# Altium PCB Audio ADC.PcbDoc
Units mil, origin at the board's own origin, x right, y up, seen from the top; angles counter-clockwise.
Board outline 2385 x 2675 mil, 2 copper layers (Top Layer, Bottom Layer); 54 components, 44 nets, 197 pads, 10 vias.
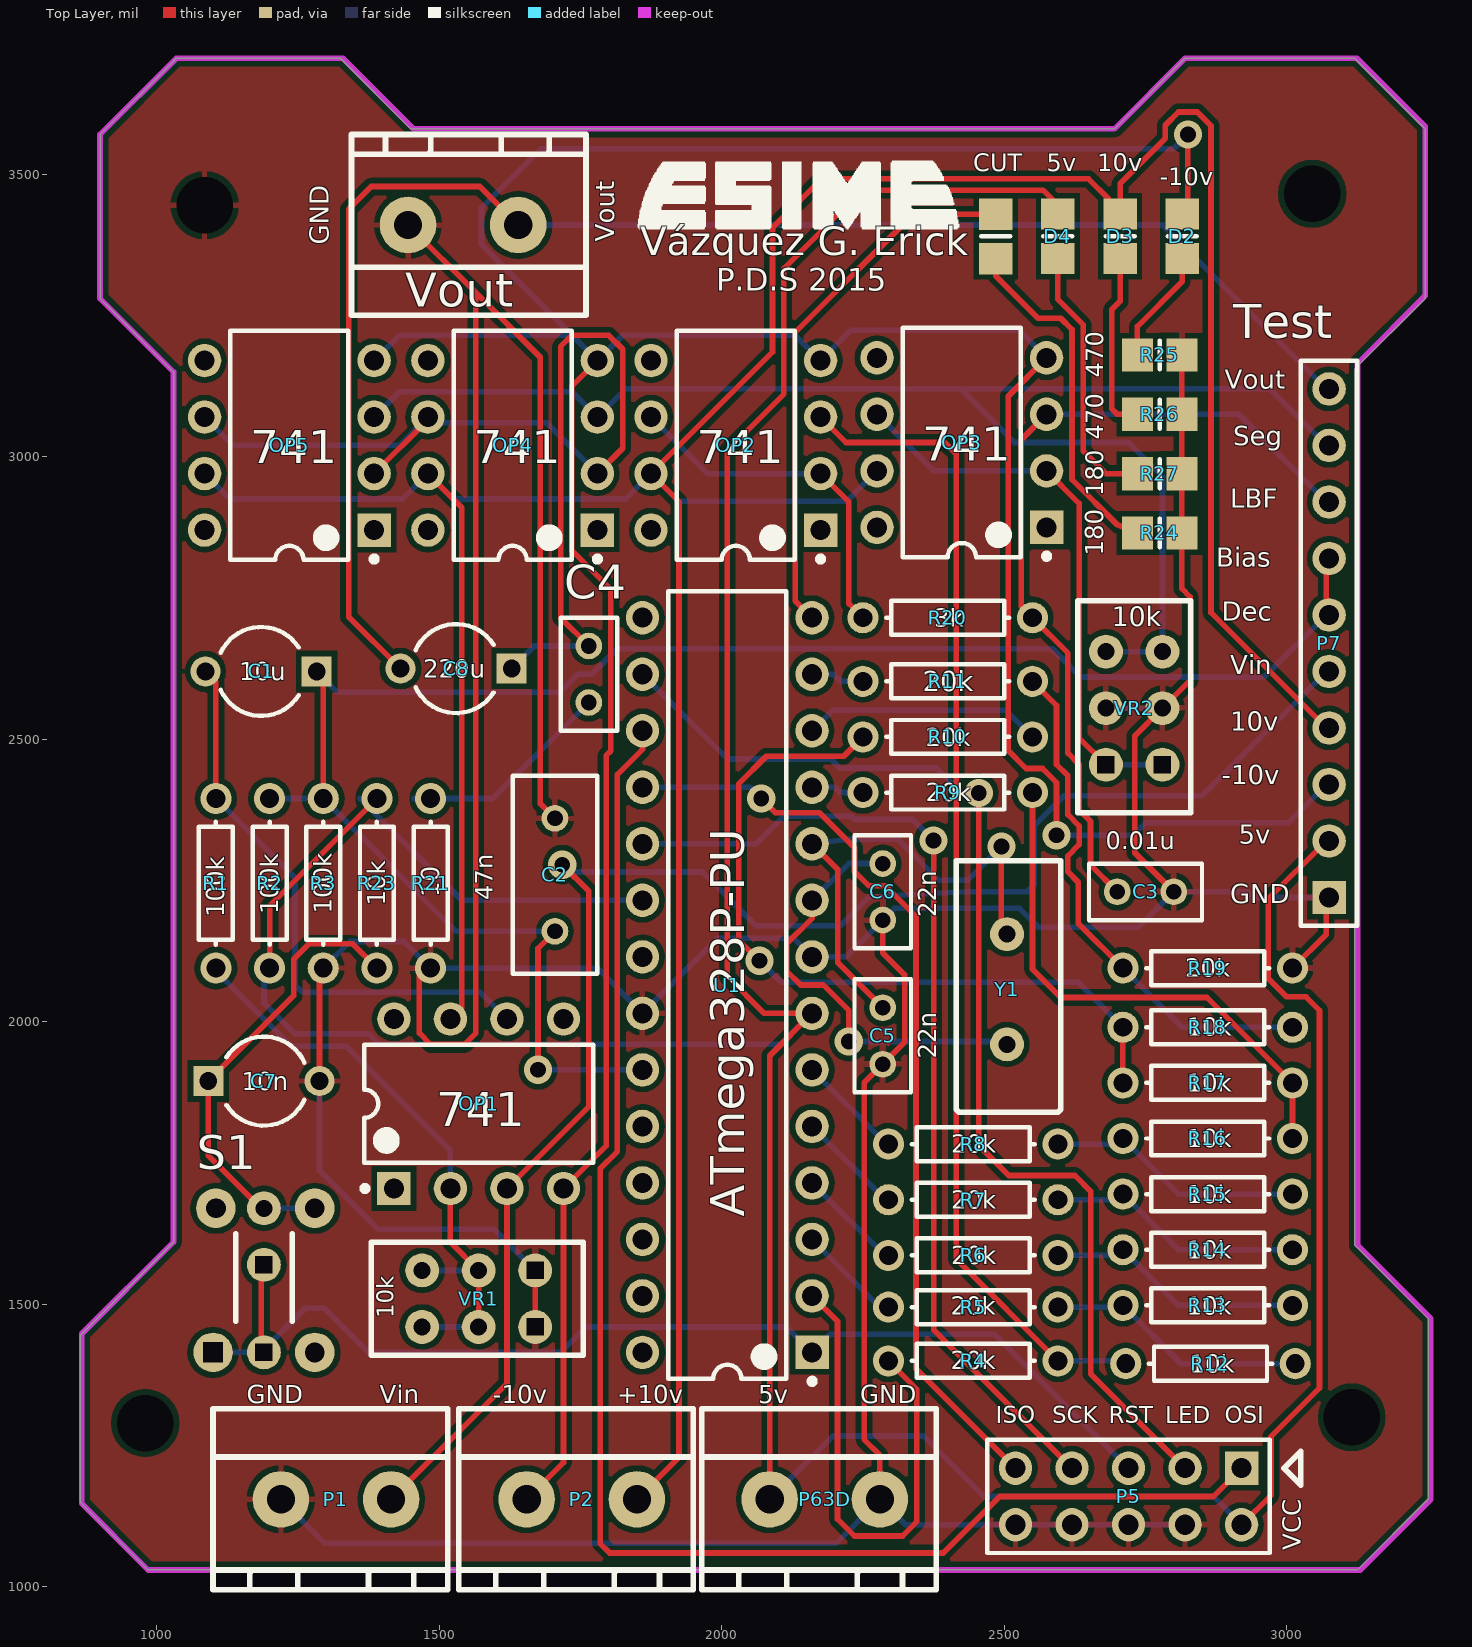
[diagram p0: Top Layer view]
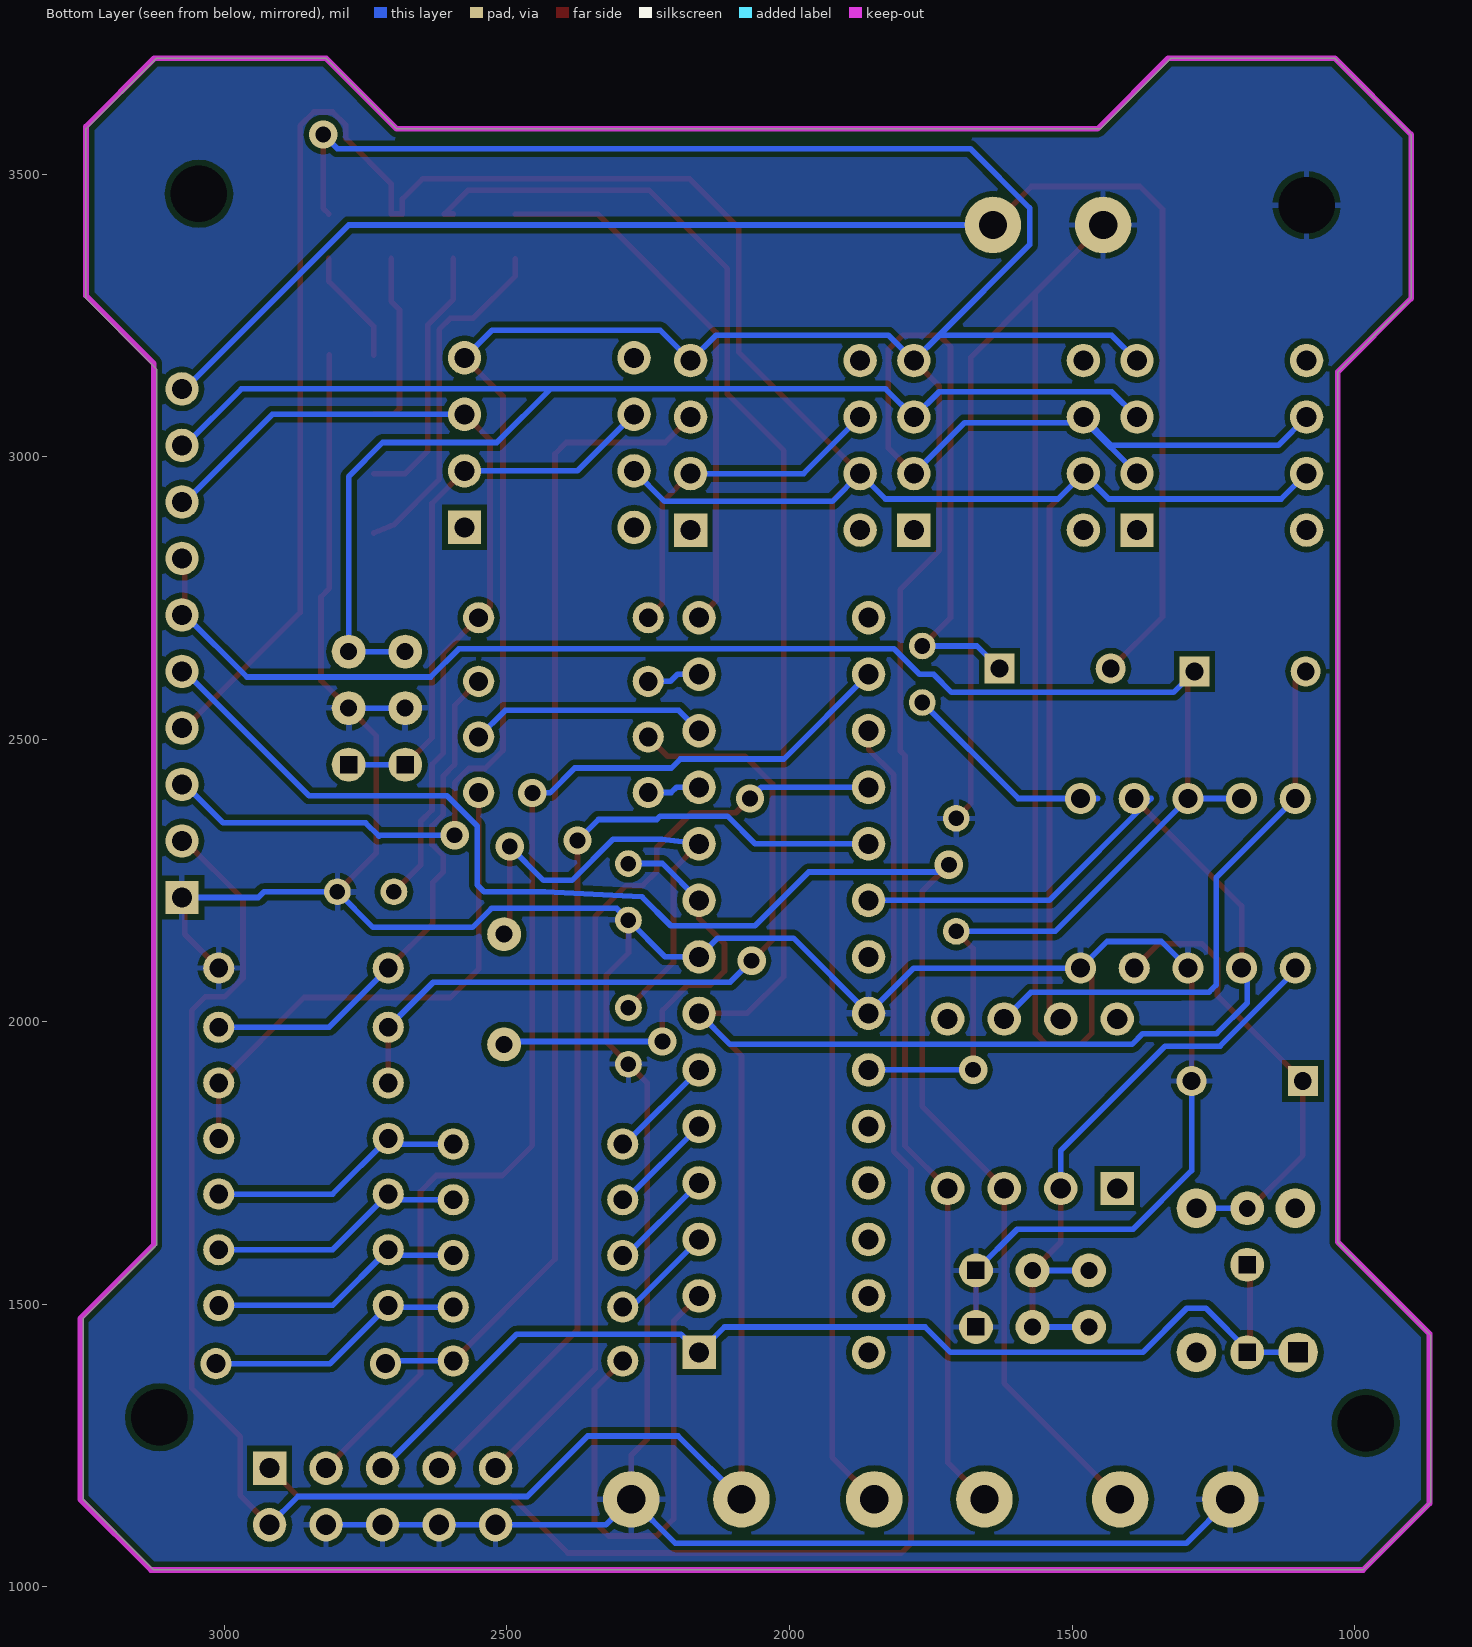
[diagram p1: Bottom Layer view, seen from below]

## Layer stack, top to bottom
Top Solder: solder mask 0.4, Solder Resist, Dk 3.5
Top Layer: signal copper 1.4
Dielectric1: dielectric 12.6, FR-4, Dk 4.8
Bottom Layer: signal copper 1.4
Bottom Solder: solder mask 0.4, Solder Resist, Dk 3.5

## Board outline
3125,1030 3250,1155 3250,1460 3250,1475 3125,1600 3120,1605 3120,3115 3120,3155 3245,3280 3245,3580 3120,3705 2820,3705 2695,3580 1450,3580 1325,3705 1035,3705 1025,3695 900,3570 900,3560 900,3280 920,3260 1030,3150 1030,3135 1030,1610 965,1545 865,1445 865,1150 870,1145 985,1030 1025,1030 1000,1030

## Design rules (kind name [scope] priority, off if disabled: settings)
Clearance [All] p1: gap=10
ComponentClearance [All] p1: gap=5 collisioncheckmode=3 verticalgap=5 showdistances=FALSE
HoleSize [All] p1: absolutevalues=TRUE maxlimit=100 minlimit=13 maxpercent=80.000 minpercent=20.000
PlaneConnect [InNet('GND')] p1: planeconnectstyle=Direct reliefexpansion=20 reliefentries=4 reliefconductorwidth=10 reliefairgap=10
PolygonConnect [All] p1: connectstyle=Relief reliefconductorwidth=10 reliefentries=4 polygonreliefangle="90 Angle" airgapwidth=10
RoomDefinition "Audio ADC" [InComponentClass('Audio ADC')] p1 off: confinementstyle=ConfineIn formatcopy=TRUE lockcomponents=FALSE outline 3295,1090 3640,1090 3640,1460 3295,1460
RoutingVias [All] p1 off: holewidth=28 width=50 viastyle="Through Hole" minholewidth=28 minwidth=50 maxholewidth=28 maxwidth=50
SilkToSilkClearance [All] p1: silktosilkclearance=0
SilkToSolderMaskClearance [All] p1: minsilkscreentomaskgap=1 clearancetoexposedcopper=TRUE
SolderMaskExpansion [All] p1: expansion=4
UnpouredPolygon [All] p1: allowunpoured=FALSE
Width [All] p1: maxlimit=10 minlimit=10 preferedwidth=10
24 further rules are at their usual default settings.

## Components (designator, comment, footprint, x,y, rotation, side; value= is the part's Value field where it differs from the comment)
C1 "10u" CAPR5-4X5 1185,2620 r180 top
C2 "47n" RAD-0.2 1705,2260 r270 top
C3 "0.01u" RAD-0.1 2750,2230 r180 top
C4 "Cap" RAD-0.1 1765,2615 r270 top
C5 "22n" RAD-0.1 2285,1975 r90 top
C6 "22n" RAD-0.1 2285,2230 r90 top
C7 "10n" CAPR5-4X5 1190,1895 r0 top
C8 "220u" CAPR5-4X5 1530,2625 r180 top
CUT "LED1" 6-0805_M 2485,3389.69 r270 top (schematic designator D1)
D2 "-10v" 6-0805_M 2815,3390 r90 top
D3 "10v" 6-0805_M 2705,3390 r270 top
D4 "5v" 6-0805_M 2595,3390 r270 top
OP1 "741" DIP-8 1570,1855 r90 top
OP2 "741" DIP-8 2025,3020 r180 top
OP3 "741" DIP-8 2425,3025 r180 top
OP4 "741" DIP-8 1630,3020 r180 top
OP5 "741" DIP-8 1235,3020 r180 top
P1 "Vin" cONECTOR 1215,1055 r0 top
P2 "+10v" cONECTOR 1650,1055 r0 top
P5 "VCC" HDR2X5 2920,1210 r180 top
P7 "Test" HDR1X10 3075,2220 r90 top
P63D "5v" cONECTOR 2080,1055 r0 top
R1 "100k" AXIAL-0.3 1105,2245 r90 top
R2 "100k" AXIAL-0.3 1200,2245 r270 top
R3 "100k" AXIAL-0.3 1295,2245 r90 top
R4 "20k" AXIAL-0.3 2445,1400 r0 top
R5 "20k" AXIAL-0.3 2445,1495 r0 top
R6 "20k" AXIAL-0.3 2445,1586.65 r0 top
R7 "20k" AXIAL-0.3 2445,1685.08 r0 top
R8 "20k" AXIAL-0.3 2445,1783.5 r0 top
R9 "20k" AXIAL-0.3 2400,2405.63 r0 top
R10 "20k" AXIAL-0.3 2400,2504.06 r180 top
R11 "20k" AXIAL-0.3 2400,2602.48 r0 top
R12 "10k" AXIAL-0.3 2865,1395 r180 top
R13 "10k" AXIAL-0.3 2860,1498.23 r180 top
R14 "10k" AXIAL-0.3 2860,1596.65 r180 top
R15 "10k" AXIAL-0.3 2860,1695.08 r180 top
R16 "10k" AXIAL-0.3 2860,1793.5 r180 top
R17 "10k" AXIAL-0.3 2860,1891.93 r0 top
R18 "10k" AXIAL-0.3 2860,1990.35 r180 top
R19 "20k" AXIAL-0.3 2860,2095 r180 top
R20 "3k" AXIAL-0.3 2400,2715 r180 top
R21 "10" AXIAL-0.3 1485,2245 r90 top
R23 "10k" AXIAL-0.3 1390,2245 r270 top
R24 "180" 6-0805_M 2775,2865 r180 top
R25 "470" 6-0805_M 2775,3180 r180 top
R26 "470" 6-0805_M 2775,3075 r180 top
R27 "180" 6-0805_M 2775,2970 r180 top
S1 "SW-PB" PBUniversal 1190,1540 r90 top
U1 "ATmega328P-PU" 28P3 2010,2065 r180 top
Vout "Speaker" cONECTOR 1645,3510 r180 top
VR1 "10k" TPParado 1570,1460 r180 top
VR2 "10k" TPParado 2680,2555 r90 top
Y1 "16Mhz" Crystal 2505,2065 r90 top

## Footprints (in the part's own frame and the unit in brackets; to place one, negate y for a bottom-side part, rotate by r counter-clockwise, add the part's x,y. Pads: shape width x height; smd on the part's side, far side on the other; paste and mask are expansions set on the pad)
6-0805_M [mm] "Chip Resistor, Body 2.0x1.2mm, IPC Low Density"
  rect 1.4x1.5 smd: 1(-1,0) 2(1,0)
  silkscreen extent 0,-0.65 0,0.65, body extent -1.07,-0.7 1.07,0.7, height 0.7
28P3 [mm] "DIP, 28-Leads, Row Spacing 7.62mm, Pitch 2.54mm, Body 34.67x7.3mm"
  rect 1.5x1.5 hole 0.9: 1(-3.81,16.51)
  round 1.5 hole 0.9: 2(-3.81,13.97) 3(-3.81,11.43) 4(-3.81,8.89) 5(-3.81,6.35) 6(-3.81,3.81) 7(-3.81,1.27) 8(-3.81,-1.27) 9(-3.81,-3.81) 10(-3.81,-6.35) 11(-3.81,-8.89) 12(-3.81,-11.43) 13(-3.81,-13.97) 14(-3.81,-16.51) 15(3.81,-16.51) 16(3.81,-13.97) 17(3.81,-11.43) 18(3.81,-8.89) 19(3.81,-6.35) 20(3.81,-3.81) 21(3.81,-1.27) 22(3.81,1.27) 23(3.81,3.81) 24(3.81,6.35) 25(3.81,8.89) 26(3.81,11.43) 27(3.81,13.97) 28(3.81,16.51)
  silkscreen extent -3.94,-17.7 2.65,17.93, body extent -3.6,-17.65 3.6,17.65, height 4.58
AXIAL-0.3 [mm] "Axial Device, Thru-Hole; 2 Leads; 0.3 in Pin Spacing"
  round 1.4 hole 0.85: 1(-3.81,0) 2(3.81,0)
  silkscreen extent -2.77,-0.76 2.77,0.76
CAPR5-4X5 [mm] "Capacitor; 2 Leads"
  rect 1.35x1.35 hole 0.8: 1(-2.5,0)
  round 1.35 hole 0.8: 2(2.5,0)
  silkscreen extent -1.69,-2 1.82,2
cONECTOR [mil]
  round 100 hole 50: 1(5,100) 2(200,100)
  silkscreen extent -115,-60 300,260, body extent -118,-61 298,260, height 394
Crystal [mil]
  round 60 hole 30: 1(90,0) 2(-105,0)
  silkscreen extent -225,-95 220,90, body extent -228,-97 218,87, height 142
DIP-8 [mm] "DIP; 8 Leads; Row Spacing 7.62 mm; Pitch 2.54 mm"
  rect 1.5x1.5 hole 0.9: 1(-3.81,3.81)
  round 1.5 hole 0.9: 2(-3.81,1.27) 3(-3.81,-1.27) 4(-3.81,-3.81) 5(3.81,-3.81) 6(3.81,-1.27) 7(3.81,1.27) 8(3.81,3.81)
  silkscreen extent -3.93,-5.15 2.65,5.23, body extent -3.6,-5.15 3.6,5.15, height 5.08
HDR1X10 [mm] "Connector; Header; 10 Position"
  rect 1.5x1.5 hole 0.9: 1(0,0)
  round 1.5 hole 0.9: 2(2.54,0) 3(5.08,0) 4(7.62,0) 5(10.16,0) 6(12.7,0) 7(15.24,0) 8(17.78,0) 9(20.32,0) 10(22.86,0)
  silkscreen extent -1.27,-1.27 24.13,1.27
HDR2X5 [mm] "Connector; Header; 5x2 Position"
  rect 1.5x1.5 hole 0.9: 1(0,0)
  round 1.5 hole 0.9: 2(0,2.54) 3(2.54,0) 4(2.54,2.54) 5(5.08,0) 6(5.08,2.54) 7(7.62,0) 8(7.62,2.54) 9(10.16,0) 10(10.16,2.54)
  silkscreen extent -1.27,-1.27 11.43,3.81, body extent -1.37,-1.37 11.53,3.91
PBUniversal [mil]
  round 60 hole 30 square: 1(-125,0) 1(30,0)
  round 70 hole 35 square: 1(-125,90)
  round 70 hole 35: 2(130,-90) NC(-125,-90) NC(130,85)
  round 60 hole 30: 2(130,0)
  silkscreen extent -70,-50 85,50, body extent -152,-119 152,119, height 198
RAD-0.1 [mm] "Radial Cap, Thru-Hole; 2 Leads; 0.1 in Pin Spacing"
  round 1.2 hole 0.7: 1(-1.27,0) 2(1.27,0)
  silkscreen extent -2.54,-1.27 2.54,1.27
RAD-0.2 [mm] "Radial Cap, Thru-Hole; 2 Leads; 0.2 in Pin Spacing"
  round 1.2 hole 0.7: 1(-2.54,0) 2(2.54,0)
  silkscreen extent -4.44,-1.91 4.44,1.91
TPParado [mil]
  round 60 hole 30 square: 1(-100,0) 1(-100,-100)
  round 60 hole 30: 2(0,0) 2(0,-100) 3(100,0) 3(100,-100)
  silkscreen extent -185,-150 190,50, body extent -188,-145 188,45, height 458

## Part data
C1 C7 C8: library part Cap2, "Capacitor"
C2 C3 C5 C6: library part Cap, "Capacitor"
C4: "Capacitor"
CUT: "Typical RED GaAs LED"
D2 D3 D4: library part LED1, "Typical RED GaAs LED"
OP1 OP2 OP3 OP4 OP5: library part "Op Amp", "FET Operational Amplifier"
P1 P2 P63D: library part MHDR1X2, "Header, 2-Pin"
P5: library part "Header 5X2", "Header, 5-Pin, Dual row"
P7: library part "Header 10", "Header, 10-Pin"
R1 R2 R3 R4 R5 R6 R7 R8 R9 R10 R11 R12 R13 R14 R15 R16 R17 R18 R19 R20 R21 R23 R24 R25 R26 R27: library part Res1, "Resistor"
S1: "Switch"
U1: "8-bit AVR Microcontroller, 32KB Flash, 1KB EEPROM, 2KB SRAM, 28-pin PDIP, Industrial Grade (-40°C to 85°C)"
Vout: "Loudspeaker"
VR1 VR2: library part RPot, "Potentiometer"
Y1: library part XTAL, "Crystal Oscillator"

## Free pads (board coordinates)
  round 40 hole 100: 0(980,1290) 0(1085,3445) 0(3045,3465) 0(3115,1300)

## Via types
v1: diameter 50, hole 28, Top Layer to Bottom Layer, 10 vias

## Nets (pads, with @x,y where several pads share a name; then routed paths per layer and width w, separated by ;. In a path a pad name is that pad's centre, name@x,y a point inside that pad or via, vN(x,y) a via of type N, cw(c..) or ccw(c..) an arc to the next point about the centre after c; other vN are vias at no path point)
5V: D4.1 P5.2 P7.2 P63D.1 R2.2 R23.1 U1.7 U1.20 | length 7305.6
  Top Layer w10: R2.2 1200,2205 R23.1 ; P63D.1 2085,1940 U1.7 2075,2015 2010,2080 2010,3011 2110,3111 2110,3333 2248.62,3471.62 2568.38,3471.62 2610.63,3429.37 D4.1 ; P5.2 2972,1162 2972,1266 3058,1352 3058,2020 3034,2044 3000,2044 2967,2077 2967,2217 P7.2@3070,2320
  Bottom Layer w10: R2.2@1190,2095 1190,2033.28 1244.28,1979 1375,1979 1394,1960 2105,1960 U1.7 ; 1360,2395 1540,2215 U1.20 ; P63D.1 2197,1267 2357,1267 2464,1160 2870,1160 P5.2
10V: D3.1 OP1.7 OP2.7 OP3.7 OP4.7 OP5.7 P2.2 P7.4 | length 6829.3
  Top Layer w10: OP4.7 1540,2910 1540,2025 OP1.7 ; P2.2 1924.53,1229.53 1924.53,2920.47 OP2.7 2090,3185 2090,3405 2176.62,3491.62 2649.38,3491.62 2685,3456 2685,3429.37 D3.1 2705,3483 2785,3563 2785,3586.57 2808.43,3610 2841.57,3610 2866,3585.57 2866,2724 P7.4@3070,2520
  Bottom Layer w10: OP5.7 1130,2925 1435,2925 OP4.7 1525,2925 1830,2925 OP2.7 1924,2921 2221,2921 OP3.7
-10V: D2.2 OP1.4 OP2.4 OP3.4 OP4.4 OP5.4 P2.1 P7.3 | length 6612.5
  Top Layer w10: P2.1 1720,1220 OP1.4 1795.47,1780.47 1795.47,2471 1804,2479.53 1804,2765 1735,2834 1735,3125 OP4.4 ; OP3.4 2507,3107 2507,2480 2538.81,2448.19 2567.63,2448.19 2592.56,2423.26 v1(2592.56,2330) ; D2.2 2825,3439.37 v1(2825,3570)
  Bottom Layer w10: OP5.4 1430,3215 1735,3215 ; OP3.4 2526,3224 2229,3224 OP2.4 2130,3215 1825,3215 OP4.4 1735,3215 ; v1(2592.56,2330) 2725,2330 2726.5,2328.5 2750,2352 3002,2352 P7.3@3070,2420 ; v1(2825,3570) 2800,3545 1680,3545 1575,3440 1575,3375 1735,3215
CORTE: CUT.1 U1.14 | length 959
  Top Layer w10: U1.14 2130,2745 2130,3220 2339.06,3429.06 CUT.1
"DC BIAS": C1.1 C2.2 P7.6 P7.7 R2.1 R3.2 U1.23 | length 3274.6
  Top Layer w10: C1.1 1295,2608.43 R3.2 ; v1(1675,1915) 1675,2130 C2.2 ; P7.6@3070,2720 P7.7@3070,2820
  Bottom Layer w10: R2.1 R3.2 1530,2160 C2.2 ; C1.1 1320.43,2583 1713,2583 1745,2615 1770,2615 1815,2660 2585,2660 2635,2610 2960,2610 P7.6@3070,2720 ; v1(1675,1915) U1.23
DIGITAL: OP2.3 R4.2 R12.2 | length 2068.6
  Top Layer w10: OP2.3 2220,3025 2395,3025 2415,3005 2415,1580 R4.2
  Bottom Layer w10: R4.2 2710,1400 R12.2
FILTRO: C3.2 OP3.3 P7.8 R20.1 | length 1493.3
  Top Layer w10: OP3.3 2530,3030 2530,2735 R20.1 2612.56,2652.44 2612.56,2475.36 2632.56,2455.36 2632.56,2374.85 2652.56,2354.85 2652.56,2277.44 C3.2
  Bottom Layer w10: OP3.3 2915,3075 P7.8@3070,2920
GND: C2.1 C3.1 C5.1 C6.1 C7.2 P1.1 P5.4 P5.6 P5.8 P5.10 P7.1 P63D.2 pad.0@1085,3445 R3.1 R19.1 R21.1 R24.1 R25.1 R26.1 R27.1 U1.8 U1.22 Vout.2 VR1.1 VR2.2 | length 9658.9
  Top Layer w10: C7.2 R3.1@1288.43,2095 ; Vout.2 1565,3290 ; R21.1@1465,2095 1465,1980 1485,1960 1545,1960 1565,1980 1565,3290 ; R21.1 R21.1@1495,2095 ; VR1.1@1670,1460 VR1.1@1670,1560 ; C2.1 1679,2386 1679,3176 1565,3290 ; P63D.2 2280,1233 2252,1261 2252,1892 C5.1 2324,1964 2324,2083 2285,2122 C6.1 ; C3.1 2731,2299 2731,2506 2780,2555 2829,2604 2829,2752 2814.37,2766.63 R24.1 R27.1 R26.1 R25.1 ; R19.1 3070,2155 P7.1@3070,2220
  Bottom Layer w10: P1.1 1298,1077 2202,1077 P63D.2 2325,1110 P5.10 P5.8 P5.6 P5.4 ; C7.2 1288.43,1736.57 1392,1633 1597,1633 VR1.1@1670,1560 ; R3.1 1342,2142 1438,2142 R21.1 1780,2095 U1.22 1993.03,2148.03 2126.97,2148.03 U1.8 2220,2115 C6.1 2305.75,2200.75 2527.25,2200.75 2561,2167 2737,2167 C3.1 2930,2230 2940,2220 P7.1@3070,2220 ; VR2.2@2680,2555 VR2.2@2780,2555
MISO: P5.9 U1.18 | length 1652.4
  Top Layer w10: v1(2070,2395) 2095,2370 2173,2370 2235,2308 2235,2266 2260,2241 2289,2241 2344,2186 2344,1386 P5.9
  Bottom Layer w10: U1.18 2050,2415 v1(2070,2395)
MOSI: P5.1 U1.17 | length 2673.2
  Top Layer w10: U1.17 1860,2482 1815.47,2437.47 1815.47,1770.47 1785,1740 1785,1077 1802,1060 2392,1060 2492,1160 2870,1160 P5.1
NC: P5.3 U1.16 | length 2096.7
  Top Layer w10: v1(2455,2405) 2455,1781 2508,1728 2625,1728 2653,1700 2653,1377 P5.3
  Bottom Layer w10: U1.16 2010,2465 2193,2465 2209,2449 2380,2449 2424,2405 v1(2455,2405)
NetC1_2: C1.2 OP1.6 R1.2 | length 1028.3
  Top Layer w10: C1.2 1105,2601.57 R1.2
  Bottom Layer w10: R1.2 1245,2255 1245,2065 1257.56,2052.44 ; 1252,2058 1257.56,2052.44 ; OP1.6 1573,2052 1308,2052 1307.56,2052.44 1257.56,2052.44
NetC4_1: C4.1 C8.1 OP4.2 OP4.6 OP5.2 OP5.6 | length 2116.5
  Top Layer w10: OP5.2 1480,3065 OP4.6 ; C4.1 1715,2715 1715,3195 1735,3215 1800,3215 1825,3190 1825,3015 OP4.2
  Bottom Layer w10: OP5.6 1135,3020 1430,3020 OP4.6 ; OP5.2 1475,3060 1690,3060 OP4.2 ; C8.1 1668.43,2665 C4.1
NetC4_2: C4.2 R21.2 | length 380.4
  Bottom Layer w10: 1455,2395 1595,2395 C4.2
NetC7_1: C7.1 R23.2 S1.2 | length 808.4
  Top Layer w10: S1.2@1185,1670 1091.57,1763.43 C7.1 1242.56,2045.99 1242.56,2110.56 1270,2138 1347,2138 R23.2
  Bottom Layer w10: S1.2@1185,1670 S1.2@1275,1670
NetCUT_2: CUT.2 R24.2 | length 621.8
  Top Layer w10: CUT.2 2485,3320 2560,3245 2600,3245 2620,3225 2620,2959.53 2700,2879.53 R24.2
NetD2_1: D2.1 R25.2 | length 203.5
  Top Layer w10: R25.2 2735.63,3230.63 2815,3310 D2.1
NetD3_2: D3.2 R26.2 | length 321.6
  Top Layer w10: D3.2 2705,3275 2690,3260 2690,3085 2700,3075 R26.2
NetD4_2: D4.2 R27.2 | length 471.5
  Top Layer w10: D4.2 2595,3278.28 2640,3233.28 2640,3010 2680,2970 R27.2
NetOP1_2: OP1.2 R1.1 VR1.2 VR1.3 | length 1104.2
  Top Layer w10: OP1.2 1520,1610 1570,1560 VR1.2@1570,1460
  Bottom Layer w10: R1.1@1087.5,2107.5 1238,1957 1335,1957 1520,1772 OP1.2 ; VR1.3@1470,1460 VR1.2@1570,1460 ; VR1.3@1470,1560 VR1.2@1570,1560
NetOP2_2: OP2.2 OP2.6 R20.2 | length 627.5
  Top Layer w10: OP2.2 2225,2920 2225,2740 R20.2
  Bottom Layer w10: OP2.6 1975,2970 OP2.2
NetOP3_2: OP3.2 OP3.6 VR2.1 | length 1004.9
  Top Layer w10: OP3.2 2632.56,2917.44 2632.56,2502.44 VR2.1@2680,2455
  Bottom Layer w10: OP3.6 2375,2975 OP3.2 ; VR2.1@2680,2455 VR2.1@2780,2455
NetR4_1: R4.1 U1.2 | length 882.1
  Top Layer w10: U1.2 2205,1470 2205,1120 2235,1090 2320,1090 2345,1115 2345,1350 R4.1
NetR5_1: R5.1 U1.3 | length 185
  Bottom Layer w10: U1.3 2279.57,1495.43 2279.57,1495 R5.1
NetR5_2: R5.2 R12.1 R13.2 | length 464.1
  Bottom Layer w10: R5.2 2706.77,1495 R13.2 2813.23,1395 R12.1
NetR6_1: R6.1 U1.4 | length 197.6
  Bottom Layer w10: U1.4 2295,1580 R6.1
NetR6_2: R6.2 R13.1 R14.2 | length 459.9
  Bottom Layer w10: R6.2 2700,1586.65 R14.2 2808.43,1498.23 R13.1
NetR7_1: R7.1 U1.5 | length 188.8
  Bottom Layer w10: U1.5 2289.92,1685.08 R7.1
NetR7_2: R7.2 R14.1 R15.2 | length 459.9
  Bottom Layer w10: R7.2 2700,1685.08 R15.2 2808.42,1596.65 R14.1
NetR8_1: R8.1 U1.6 | length 189.5
  Bottom Layer w10: U1.6 2291.5,1783.5 R8.1
NetR8_2: R8.2 R15.1 R16.2 | length 459.9
  Bottom Layer w10: R8.2 2700,1783.5 R16.2 2808.43,1695.08 R15.1
NetR9_1: R9.1 U1.11 | length 93.9
  Bottom Layer w10: U1.11 2200,2415 2209.37,2405.63 R9.1
NetR9_2: R9.2 R16.1 R17.2 | length 954.3
  Top Layer w10: R9.2 2550,2093 2600,2043 2858.93,2043 R17.2 R16.1
NetR10_1: R10.1 U1.12 | length 424.4
  Bottom Layer w10: U1.12 2196,2551 2503.06,2551 R10.1
NetR10_2: R10.2 R17.1 R18.2 | length 1372.9
  Top Layer w10: v1(2067,2108) 2030,2145 2030,2421 2079,2470 2215.94,2470 R10.2 ; R17.1 R18.2
  Bottom Layer w10: v1(2067,2108) 2105,2070 2630.35,2070 R18.2
NetR11_1: R11.1 U1.13 | length 95.2
  Bottom Layer w10: U1.13 2198,2615 2210.52,2602.48 R11.1
NetR11_2: R11.2 R18.1 R19.2 | length 933.7
  Top Layer w10: R11.2 2592.56,2559.92 2592.56,2455.36 2612.56,2435.36 2612.56,2366.57 2632.56,2346.57 2632.56,2313.43 2612.56,2293.43 2612.56,2265.44 2631,2247 2631,2174 R19.2
  Bottom Layer w10: R19.2 2814.65,1990.35 R18.1
OSC1: C6.2 U1.9 Y1.2 | length 753
  Top Layer w10: U1.9 2160,2183 2115,2138 2115,2090 2140,2065 2180,2065 2225,2020 v1(2225,1965)
  Bottom Layer w10: U1.9 2225,2280 C6.2 ; v1(2225,1965) Y1.2@2488.46,1965
OSC2: C5.2 U1.10 Y1.1 | length 867.1
  Top Layer w10: U1.10 2205.34,2269.66 2205.34,2104.66 C5.2 ; Y1.1@2495,2175 v1(2495,2310)
  Bottom Layer w10: U1.10 2226,2323 2312,2323 2384.75,2250.25 2435.25,2250.25 v1(2495,2310)
RST: P5.5 S1.1 U1.1 | length 1993.3
  Top Layer w10: S1.1@1185,1415 S1.1@1185,1570
  Bottom Layer w10: S1.1@1095,1415 1185,1415 1263,1493 1297,1493 1375,1415 1715,1415 1760,1460 2115,1460 U1.1 2192,1447 2483,1447 P5.5
SCK: P5.7 U1.19 | length 1765.6
  Top Layer w10: v1(2375,2321) 2375,1455 P5.7
  Bottom Layer w10: U1.19 2061,2315 2110,2364 2229,2364 2235,2358 2338,2358 v1(2375,2321)
SEGUIDOR: OP4.3 OP5.3 P7.9 VR2.3 | length 2615.6
  Bottom Layer w10: OP5.3 1430,3115 1735,3115 OP4.3 1830,3120 2423,3120 ; VR2.3@2680,2655 2780,2655 2780,2965 2720,3025 2518,3025 2423,3120 ; P7.9@3070,3020 2970,3120 2423,3120
VIN: OP1.3 P1.2 P7.5 | length 2928.4
  Top Layer w10: P1.2 1620,1360 OP1.3 1765,1850 1765,2231 v1(1718,2278)
  Bottom Layer w10: v1(1718,2278) 1731,2265 1966,2265 2061,2170 2210,2170 2261,2221 2432.9,2230 2540.62,2230 2552.56,2241.94 2552.56,2346.57 2605.99,2400 2850,2400 P7.5@3070,2620
VOUT: C8.2 P7.10 Vout.1 | length 2745.8
  Top Layer w10: C8.2 1340,2716.57 1340,3438 1380,3478 1572,3478 Vout.1
  Bottom Layer w10: Vout.1 2780,3410 P7.10@3070,3120
pads on no net: OP1.1 OP1.5 OP1.8 OP2.1 OP2.5 OP2.8 OP3.1 OP3.5 OP3.8 OP4.1 OP4.5 OP4.8 OP5.1 OP5.5 OP5.8 S1.NC U1.15 U1.21 U1.24 U1.25 U1.26 U1.27 U1.28

## Polygon pours and split planes (outlines as drawn)
GND on Top Layer "Top Layer-No Net" (solid, pour order 4): 2695,3580 2820,3705 3120,3705 3245,3580 3245,3280 3125,3160 3120,3160 3120,1605 3250,1475 3250,1155 3125,1030 985,1030 867.5,1147.5 867.5,1442.5 865,1445 1030,1610 1030,3150 900,3280 900,3570 1035,3705 1325,3705 1450,3580 2695,3580
GND on Bottom Layer "Top Layer-No Net" (solid, pour order 3): 2700,3580 2825,3705 3125,3705 3250,3580 3250,3280 3130,3160 3125,3160 3125,1605 3255,1475 3255,1155 3130,1030 990,1030 872.5,1147.5 872.5,1442.5 870,1445 1035,1610 1035,3150 905,3280 905,3570 1040,3705 1330,3705 1455,3580 2700,3580

## Keep-outs
Keep-Out Layer:
  lines w10: 867.5,1147.5 985,1030 3130,1030 3255,1155 3255,1475 3125,1605 3125,3165 3245,3285 3245,3584.14 3124.14,3705 2820,3705 2695,3580 1455,3580 1330,3705 1035,3705 900,3570 900,3280 1029.93,3150.07 1029.93,1610.28 867.5,1447.85 867.5,1147.5

## Silkscreen, mask and mechanical layers (free items; w line width, h text height)
Top Overlay:
  drawing of 8 lines, arcs and shapes, not listed
  text "Vout" at 1810,3380 h33.46 r90
  text "GND" at 1305,3375 h33.46 r90
  text "Vázquez G. Erick" at 1855.77,3340.03 h86.61
  text "P.D.S 2015" at 1990.77,3280.03 h68.9
  text "Vout" at 2890,3120 h33.46
  text "Seg" at 2905,3020 h33.46
  text "LBF" at 2900,2910 h33.46
  text "Bias" at 2875,2805 h33.46
  text "Dec" at 2885,2710 h33.46
  text "Vin" at 2900,2615 h33.46
  text "10v" at 2900,2515 h33.46
  text "-10v" at 2885,2420 h33.46
  text "5v" at 2915,2315 h33.46
  text "GND" at 2900,2210 h33.46
  text "GND" at 1160,1325 h31.5
  text "-10v" at 1595,1325 h31.5
  text "+10v" at 1815,1325 h31.5
  text "5v" at 2065,1325 h31.5
  text "GND" at 2245,1325 h31.5
  text "ISO" at 2485,1290 h29.53
  text "SCK" at 2585,1290 h29.53
  text "RST" at 2685,1290 h29.53
  text "LED" at 2785,1290 h29.53
  text "OSI" at 2890,1290 h29.53
Drill Drawing:
  circle w10: c3115,1300 r53.54
  circle w10: c980,1290 r53.54
  circle w10: c1090,3445 r53.54
  circle w10: c3045,3465 r53.54